# Altium PCB ESP32 with USBC.PcbDoc (part 2 of 3)
Units mil, origin at the board's own origin, x right, y up, seen from the top; angles counter-clockwise.
Board outline 2700 x 1000 mil, 4 copper layers (L1, L2, L3, L4), stack 61.583 mil thick; 64 components, 73 nets, 299 pads, 161 vias.
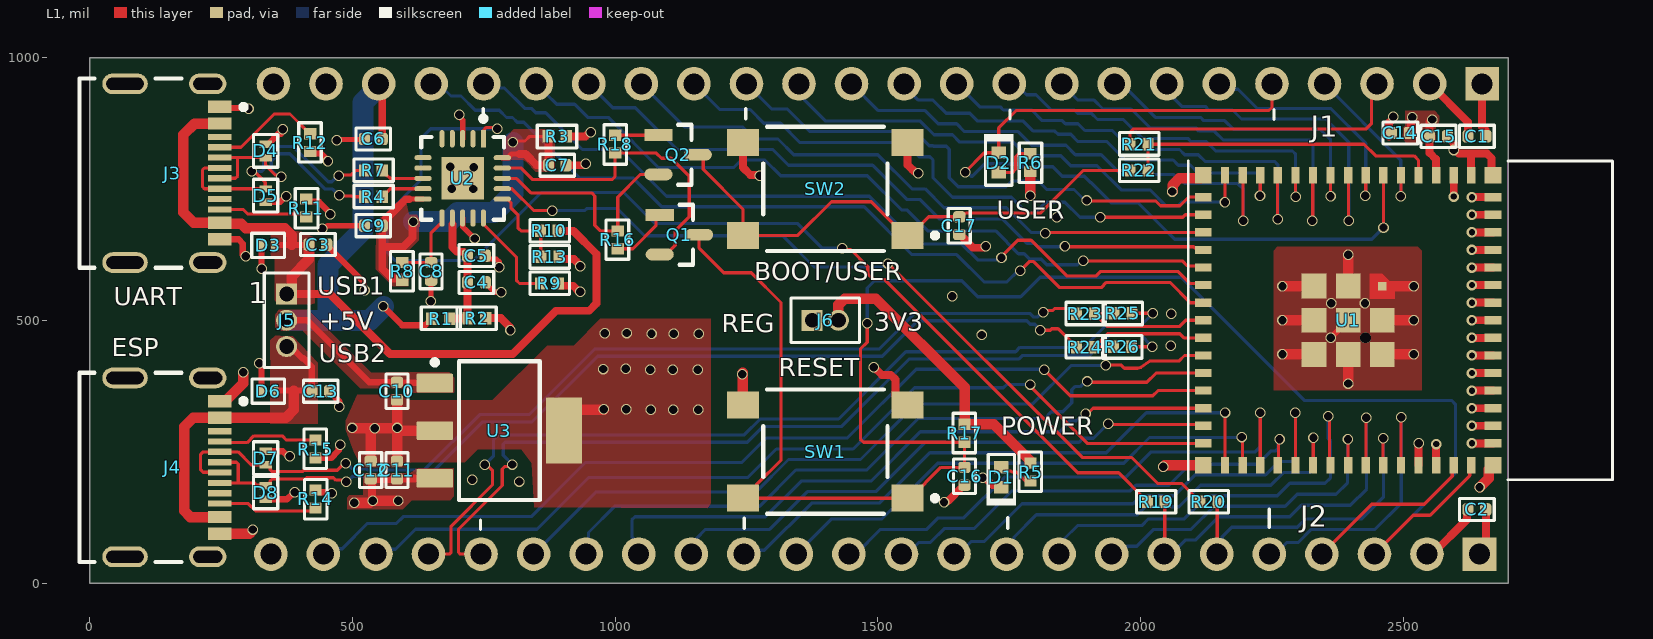
[diagram p0: L1 view]

## Part data (continued)
U1: "SMD module, ESP32-S3FN8, 8 MB SPI flash, PCB antenna", LCSC Part Number=C2913206, Manufacturer="Espressif Systems", Supplier Part Number=1965-ESP32-S3-MINI-1-N8CT-ND, Category=LDO, ComponentLink1Description=https://datasheet.octopart.com/ESP32-S3-MINI-1-N8-Espressif-Systems-datasheet-165560562.pdf?src-supplier=TME, ComponentLink1URL=https://datasheet.octopart.com/ESP32-S3-MINI-1-N8-Espressif-Systems-datasheet-165560562.pdf?src-supplier=TME, Manufacturer Part Number=ESP32-S3-MINI-1-N8, Pricing="1=3.1, 650=3.10002 (USD)", RoHS=No, Stock=14909, Supplier=Digikey
U2: "IC USB SERIAL FULL UART 20QFN", Case/Package=HVQCCN, LCSC Part Number=C132159, Manufacturer=FTDI, Max Operating Temperature=85°C, Max Supply Current=8.4mA, Max Supply Voltage=5.5V, Min Operating Temperature=-40°C, Min Supply Voltage=2.97V, Nominal Supply Voltage=5V, Package Shape=Square, Package Style="CHIP CARRIER, HEAT SINK/SLUG, VERY THIN PROFILEMeter", Power Supplies=3.3/5V, Supplier Part Number=768-1128-1-ND, Temperature Grade=INDUSTRIAL, Category="Interface ICs", ComponentLink1Description=https://datasheet.ciiva.com:443/pdfs/VipMasterIC/IC/FTDI/FTDIS00099/FTDIS00099-1.pdf?src-supplier=IHS+Markit, ComponentLink1URL=https://datasheet.ciiva.com:443/pdfs/VipMasterIC/IC/FTDI/FTDIS00099/FTDIS00099-1.pdf?src-supplier=IHS+Markit, ComponentLink2Description=https://datasheet.ciiva.com/1787/ds-ft231x-1787312.pdf?src-supplier=Digikey, ComponentLink2URL=https://datasheet.ciiva.com/1787/ds-ft231x-1787312.pdf?src-supplier=Digikey, ComponentLink3Description=https://datasheet.ciiva.com/30475/0900766b811020d3-30475405.pdf?src-supplier=Rs, ComponentLink3URL=https://datasheet.ciiva.com/30475/0900766b811020d3-30475405.pdf?src-supplier=Rs, ComponentLink4Description=https://datasheet.ciiva.com/4787/ds-ft231x-13571-4787570.pdf?src-supplier=Mouser, ComponentLink4URL=https://datasheet.ciiva.com/4787/ds-ft231x-13571-4787570.pdf?src-supplier=Mouser, ComponentLink5Description=https://datasheet.ciiva.com/1787/ft-x-series-1787313.pdf?src-supplier=Digikey, ComponentLink5URL=https://datasheet.ciiva.com/1787/ft-x-series-1787313.pdf?src-supplier=Digikey, ComponentLink6Description=https://datasheet.ciiva.com/1787/ft-x-series-1787314.pdf?src-supplier=Digikey, ComponentLink6URL=https://datasheet.ciiva.com/1787/ft-x-series-1787314.pdf?src-supplier=Digikey, Height - Seated (Max)=0.8mm, JESD-30 Code=S-XQCC-N20, Length=4mm, Manufacturer Part Number=FT231XQ-R, Pins=20, Pricing="1=2.34, 25=2.27, 100=2.2, 250=2, 500=1.82002, 1000=1.7625, 5000=1.7625 (USD)", Qualification Status="Not Qualified", Reach SVHC Compliant=Yes, RoHS=Yes, RoHS Compliant=Yes, Stock=59138, Supplier=Digikey, Surface Mount=Yes, Technology=CMOS, Terminal Form="No Lead", Terminal Pitch=0.5mm, Terminal Position=QUAD, Width=4mm
U3: "IC REG LINEAR 3.3V 1.5A SOT223-4", Case/Package=SOP, Dropout Voltage1-Max=550mV, Dropout Voltage1-Nom=340mV, Input Voltage Absolute-Max=20V, LCSC Part Number=C181262, Manufacturer="Texas Instruments", Min Input Voltage=3.8V, Operating Temperature, TJ-Max=125°C, Operating Temperature, TJ-Min=-40°C, Output Current1-Max=1.5A, Output Voltage1-Max=3.4V, Output Voltage1-Min=3.2V, Output Voltage1-Nom=3.3V, Package Body Material=Plastic, Package Shape=Rectangular, Package Style="SMALL OUTLINEMeter", Peak Reflow Temperature (Cel)=260°C, Supplier Part Number=296-24897-1-ND, Voltage Tolerance-Max=3%, Adjustability=FIXED, Category="Voltage Regulators - Linear", Channels=1, ComponentLink1Description=https://www.ti.com:443/lit/ds/symlink/tl1963a.pdf?src-supplier=IHS+Markit, ComponentLink1URL=https://www.ti.com:443/lit/ds/symlink/tl1963a.pdf?src-supplier=IHS+Markit, ComponentLink2Description=https://datasheet.ciiva.com/2046/-2046068.pdf?src-supplier=Digikey, ComponentLink2URL=https://datasheet.ciiva.com/2046/-2046068.pdf?src-supplier=Digikey, Height - Seated (Max)=1.8mm, JESD-30 Code=R-PDSO-G4, JESD-609 Code=e3, Length=6.5mm, Line Regulation-Max=0.01%, Load Regulation-Max=0.07%, Manufacturer Part Number=TL1963A-33DCYR, Max Supply Voltage=20V, Moisture Sensitivity Level=2, Number of Outputs=1, Packaging="Tape and Reel", Pins=4, Pricing="1=3.12, 10=2.255, 25=2.038, 100=1.7992, 250=1.68532, 500=1.61668, 1000=1.56017 (USD)", Qualification Status="Not Qualified", Reach SVHC Compliant=Yes, Regulator Type="FIXED POSITIVE SINGLE OUTPUT LDO REGULATOR", RoHS=Yes, RoHS Compliant=Yes, Stock=4155, Supplier=Digikey, Surface Mount=Yes, Technology=BIPOLAR, Terminal Finish=Tin, Terminal Form="Gull Wing", Terminal Pitch=2.3mm, Terminal Position=DUAL, Width=3.5mm

## Via types
v1: diameter 20, hole 16, L1 to L4, tented both sides, 142 vias
v2: diameter 20, hole 12, L1 to L4, tented both sides, 17 vias
v3: diameter 20, hole 20, L1 to L4, tented both sides, 1 vias
v4: diameter 20, hole 16, L1 to L4, 1 vias

## Nets (pads, with @x,y where several pads share a name; then routed paths per layer and width w, separated by ;. In a path a pad name is that pad's centre, name@x,y a point inside that pad or via, vN(x,y) a via of type N, cw(c..) or ccw(c..) an arc to the next point about the centre after c; other vN are vias at no path point)
+3V3: C1.2 C2.2 C14.2 C15.2 J1.2 J2.1 J6.2 R2.1 R3.1 R5.2 R6.2 R17.2 U1.3 | length 4535.5
  L1 w15: R2.1@754.06,503.03 R2.1@754.06,504.22 782.67,504.22 800.06,486.83 800.06,482.06 v1(801.01,481.1) ; R3.1@907.01,850 943.5,850 951.53,858.03 v1(953.97,858.03) ; C14.2@2511.47,856.42 2514.6,859.55 2514.6,881.16 2517,883.56 v1(2517,886) ; J1.2@2550,950 2623.07,876.93 C1.2@2623.07,850 ; v1(2555,882) 2550,877 C15.2@2550,850 2550,818.55 2561.91,806.64 2561.91,789.06 2561.99,788.98 2561.99,775.96 U1.3@2562.36,775.59 ; J2.1@2645,55 2656.93,66.93 C2.2@2656.93,140
  L1 w20: J6.2@1425,500 1425,529.07 1436.72,540.79 1496.4,540.79 1665,372.2 R17.2@1665,302.01 1720.45,302.01 1754.59,267.86 1788.74,233.72 1788.74,228.77 1789.37,228.14 R5.2@1790.55,228.14 ; v1(1790,737) R6.2@1790,782.99
  L1 w30: J6.2@1425,500 J6.2@1426.91,501.91
  L2 w15: v1(2517,886) 2548.56,886 2552.56,882 v1(2555,882)
  L2 w20: 2541.43,844.5 2541.43,722.13 2548.66,714.9 2548.66,643.48 2581.74,610.4 2581.74,312.45 2597.26,296.93 2597.26,159.92 2598.79,158.39 2598.79,101.21 J2.1@2645,55
  L2 w40: v1(801.01,481.1) 801.01,494.02 835.78,528.78 835.78,789.97 903.84,858.03 v1(953.97,858.03) 1098.54,858.03 1235.69,720.88 1331.52,720.88 ; J6.2@1425,500 1425,564.94 1401.57,588.37 1354.95,588.37 1331.52,611.81 1331.52,720.88 ; J1.2@2550,950 2554.59,945.41 2554.59,882.41 v1(2555,882) 2555,858.07 2541.43,844.5 2531.57,834.64 1887.64,834.64 v1(1790,737) 1773.88,720.88 1331.52,720.88
+3V3_FTDI: C7.2 C9.2 R3.2 R8.1 U2.10 U2.20 | length 857.7
  L1 w6: v1(805.57,838.48) 808.25,841.16 828.73,841.16 837.57,850 R3.2@872.99,850
  L1 w10.01: 608.28,730.27 608.64,730.63 U2.10@634.59,730.63 ; U2.20@785.41,809.37 796.71,809.37 796.94,809.6 796.94,810.18 803.03,816.28 818.46,816.28
  L1 w15: C9.2@556.93,678.82 556.93,639.39 ; C9.2@556.93,680 560.06,683.13 560.06,688.72 579.15,707.81 601.61,730.27 608.28,730.27 ; R8.1@595,575.98 591.87,579.11 575.76,579.11 556.93,597.94 556.93,639.39 ; v1(616.27,687.62) 614.55,685.9 614.55,662.31 614.55,657.17 596.77,639.39 556.93,639.39 ; 818.46,816.28 829.58,816.28 850.86,795 C7.2@873.07,795 ; C7.2@872.99,799.31 R3.2@872.99,850
  L4 w40: v1(616.27,687.62) 683.54,687.62 700.55,704.64 769.47,704.64 805.57,740.74 v1(805.57,838.48)
+3V3_REG: C11.2 C12.2 J6.1 U3.3 | length 1305
  L1 w15: v1@533.28,152.99 536.62,156.33 v1(539.06,156.33) ; v1@537.34,158.05 537.34,195.73 C12.2@535,198.07 C11.2@585,198.07 585.69,198.76 656.53,198.76 657.22,199.45 U3.3@656.97,199.45
  L1 w20: v1(503.51,152.99) v1@533.28,152.99 ; v1(539.06,156.33) v1@587.18,156.33
  L2 w40: v1(587.41,156.56) 596.06,156.56 682.57,243.06 ; 1337.52,455.73 1337.52,462.52 J6.1@1375,500
  L2 w60: 682.57,243.06 747.98,308.48 827.43,308.48 870.38,265.52 919.01,265.52 920.89,267.41 1296.88,267.41 1337.52,308.05 1337.52,455.73
+5V: C6.2 C10.1 J1.22 J5.2 R1.1 U3.1 | length 1235.5
  L1 w12: J5.2@375,500 414,500 532.07,381.93 C10.1@585,381.93 585.69,381.24 656.28,381.24 U3.1@656.97,380.55 ; v1(559.13,526.31) 594.74,490.71 638.64,490.71 645.25,497.32 646.43,497.32 651.06,501.95 R1.1@651.06,503.13
  L1 w15: J1.22@550,950 556.93,943.07 C6.2@556.93,846.18
  L4 w40: J5.2@375,500 453.87,500 ; J1.22@550,950 550,943.51 520.54,914.04 520.54,671.55 453.87,604.88 453.87,500 ; v1(559.13,526.31) 532.82,500 453.87,500
+5V_VBUS1: C3.2 D3.2 J3.A4B9 J3.B4A9 J5.1 R10.2 | length 1506.5
  L1 w12: D3.2@352.45,642.61 353.17,643.32 384.97,643.32 C3.2@416.77,643.32
  L1 w15: J5.1@375,550 384.53,550 457.58,550 571.81,435.77 805.26,435.77 887.66,518.17 950.69,518.17 964.46,531.94 964.46,626.43 920.89,670 R10.2@892.01,670
  L1 w20: J3.A4B9@247.64,874.41 199.96,874.41 178.52,852.97 178.52,705.42 198.5,685.43 J3.B4A9@247.64,685.43 249.45,683.62 288.7,683.62 297.13,675.19 371.82,675.19 384.97,662.04 384.97,643.32 ; J5.1@375,550 384.53,559.53 384.53,582.9 417.48,615.85 C3.2@417.48,644.03
+5V_VBUS2: C13.2 D6.2 J4.A4B9 J4.B4A9 J5.3 | length 673.3
  L1 w12: D6.2@352.8,365 354.64,365 355.88,366.24 388.85,366.24 421.83,366.24 C13.2@423.07,365 423.07,411.66 407.06,427.67 404.9,427.67 382.58,450 J5.3@375,450
  L1 w20: J4.B4A9@247.64,125.59 191.83,125.59 180.12,137.31 180.12,297.72 196.97,314.57 J4.A4B9@247.64,314.57 373.82,314.57 388.85,329.6 388.85,366.24
+VCC_FTDI: C4.1 C5.2 R1.2 R2.2 U2.12 | length 208.3
  L1 w15: R1.2@685.08,503.13 R2.2@710.08,503.13 ; U2.12@690.32,682.28 690.32,639.11 699.1,630.33 C5.2@711.82,630.33 ; R2.2@716.2,509.25 719.14,512.19 C4.1@719.14,572 C5.2@719.14,623
BTN_GPIO0: C17.2 Q2.3 R22.1 SW2.1 SW2.2 | length 1032.7
  L1 w6: Q2.3@1157.42,815 1162.09,815 1167.88,809.21 1167.88,787.12 1243.5,711.5 SW2.2@1243.5,661.42 1347.71,661.42 1411.78,725.48 1487.51,725.48 1551.57,661.42 SW2.1@1556.5,661.42 1561.42,661.42 1596.93,696.93 C17.2@1655,696.93 1660.24,702.17 1665.45,702.17 1667.67,704.38 1810.07,704.38 1890.69,785 R22.1@1980,785
CHIP_PU: C16.2 J2.3 Q1.3 R17.1 SW1.1 SW1.2 U1.45 | length 3478.1
  L1 w6: Q1.3@1159.85,662.6 1159.85,637.33 1206.7,590.48 1259.09,590.48 1315.76,533.81 1315.76,233.67 1269.02,186.93 1269.02,182.01 SW1.2@1248.43,161.42 ; SW1.2@1243.5,161.42 SW1.2@1248.43,161.42 ; v1(1479.92,494.32) 1479.92,458.26 1466.9,445.24 1466.9,273.85 1472.76,267.99 R17.1@1665,267.99 C16.2@1665,220 1620,220 1561.42,161.42 SW1.1@1556.5,161.42 SW1.2@1248.43,161.42 ; J2.3@2445,55 2519,129 2551,129 2626.42,204.42 2626.42,221.54 U1.45@2629.29,224.41
  L4 w6: v1(1479.92,494.32) 1479.92,561.41 1493.58,575.07 1659.98,575.07 1690.19,544.86 1771.79,544.86 1808.84,581.91 2077.45,581.91 2312.29,347.08 2592.5,347.08 2599.12,340.46 2599.12,209.12 J2.3@2445,55
CON1_USB_N: D4.2 J3.A7 J3.B7 R4.1 | length 468.8
  L1 w6.03: J3.A7@247.64,770.08 277.63,770.08 281.77,774.22 281.77,809.43 ; J3.B7@247.66,809.43 281.77,809.43 ; D4.2@335,809.41 335,794.72 353.27,776.45 360.98,776.45 v4(364.42,773.01) ; D4.2@335,809.41 281.77,809.43 ; v1@475.03,737.44 475.8,736.66 499.09,736.66 500.75,735 R4.1@522.99,735
  L4 w6.03: 349.16,783.37 345.63,786.91 345.63,802.16 360.41,816.94 381.14,816.94 448.46,749.62 462.51,749.62 474.69,737.44 v1@475.03,737.44 ; 349.2,783.37 359.56,773.01 v4(364.42,773.01)
  other v1: 475.51,737.81
CON1_USB_P: D5.1 J3.A6 J3.B6 R7.1 | length 517.1
  L1 w6.03: J3.A6@247.64,789.76 218.55,789.76 215.02,786.23 215.02,753.93 218.55,750.39 J3.B6@247.64,750.39 247.83,750.2 334,750.2 334.4,750.6 334.4,762.4 316.87,779.93 311.96,779.93 v1(308.52,783.37) ; v1@473.31,775.83 473.65,776.17 497.37,776.17 506.2,785 R7.1@522.99,785
  L4 w6.03: v1(308.52,783.37) 328.07,783.37 331.6,786.91 331.6,807.97 354.6,830.97 386.96,830.97 454.27,763.65 460.79,763.65 472.98,775.83 v1@473.31,775.83
  other v1: 473.97,774.78
CON2_USB_N: D7.2 J4.A7 J4.B7 R23.1 | length 1905.6
  L1 w6.03: J4.A7@247.64,210.24 247.02,210.85 215.95,210.85 211.38,215.43 211.38,244.73 216.25,249.61 J4.B7@247.64,249.61 282.66,249.61 307.26,225 D7.2@335,225 339.92,225 343.8,221.13 343.8,215.55 347.33,212.01 405.18,212.01 407.64,214.47 471.23,214.47 482.66,225.91 487.66,225.91 v1(487.66,227.81) ; v1(1815.13,515.63) 1817.8,518.3 1832.25,518.3 1836.12,522.17 1868.32,522.17 1869.34,521.14 1870.52,521.14 1878.14,513.53 R23.1@1878.14,512.35
  L4 w6.03: v1(487.66,227.81) 489.51,227.81 500.17,217.15 526.77,217.15 528.73,215.2 636.91,215.2 742.27,320.55 836.15,320.55 961.01,445.42 1502.78,445.42 1570.51,513.15 1789.19,513.15 1795.86,506.48 1804.61,506.48 1813.76,515.63 v1(1815.13,515.63)
CON2_USB_P: D8.1 J4.A6 J4.B6 R24.1 | length 1872
  L1 w6.03: J4.B6@247.64,190.55 280.58,190.55 ; J4.A6@247.64,229.92 279.34,229.92 282.87,226.39 282.87,192.85 280.58,190.55 ; v1(488.37,192.46) 484.93,195.9 468.86,195.9 464.31,200.44 413.45,200.44 410.99,197.99 347.33,197.99 343.8,194.45 343.8,188.87 339.92,185 D8.1@335,185 333.61,186.39 317.68,186.39 313.51,190.55 280.58,190.55 ; v1(1809.05,481.07) 1828.27,481.07 1831.11,483.91 1843.06,483.91 1869.16,457.81 1870.34,457.81 1877.96,450.2 R24.1@1877.96,449.02
  L4 w6.03: v1(488.37,192.46) 490.23,192.46 500.89,203.12 520.96,203.12 522.91,201.17 642.73,201.17 748.08,306.52 841.96,306.52 966.82,431.39 1508.59,431.39 1576.32,499.12 1783.38,499.12 1790.05,492.45 1798.54,492.45 1809.05,481.93 v1(1809.05,481.07)
CON_ESP_USB_N: J2.21 R25.1 | length 1700.9
  L1 w6.03: J2.21@645,55 684.45,55 687.99,58.53 687.99,108.01 766.6,186.62 766.6,214.84 756.25,225.2 v1(752.19,225.2) ; R25.1@1983.46,513.37 v1(2023.54,513.39)
  L4 w6.03: v1(752.19,225.2) 768.37,241.37 768.37,272.27 777.92,281.82 1245.81,281.82 1276.04,312.05 1425.46,312.05 1553.51,440.1 1762.11,440.1 1770.37,448.35 1892.37,448.35 1933.07,489.05 1999.2,489.05 v1(2023.54,513.39)
CON_ESP_USB_P: J2.20 R26.1 | length 1678.8
  L1 w6.03: J2.20@745,55 705.55,55 702.01,58.53 702.01,102.2 785.49,185.67 785.49,216.91 790.6,222.02 801.31,222.02 v1(804.75,225.46) ; R26.1@1982.48,449.75 v1@2022.55,449.75
  L4 w6.03: v1(804.75,225.46) 787.11,243.1 787.11,264.26 790.64,267.79 1251.62,267.79 1281.85,298.02 1431.27,298.02 1559.32,426.07 1767.92,426.07 1774.59,432.74 1902.05,432.74 1943.37,474.06 1998.27,474.06 v1(2022.56,449.77)
CON_GPIO0: J1.3 R21.1 | length 569
  L1 w6: R21.1@1980,835 1980,857.78 1985.86,863.64 2428.55,863.64 2439.67,874.76 2439.67,939.67 J1.3@2450,950
DTR_FTDI: Q2.2 R16.2 U2.18 | length 453.4
  L1 w6: U2.18@785.41,770 785.64,769.77 812.38,769.77 813.16,769 839.81,742.34 955.47,742.34 961.33,736.49 961.33,680.78 972.11,670 R16.2@1005,670 1005,734.2 1048.4,777.6 Q2.2@1082.58,777.6
ESP_USB_N: R23.2 R25.2 U1.23 | length 270.9
  L1 w6.03: R25.2@1948.42,512.35 R23.2@1912.15,512.35 1912.15,511.17 1919.77,503.55 1920.95,503.55 1936.13,488.38 2074.47,488.38 2086.1,500 U1.23@2119.45,500 ; R25.2@1949.44,513.37 1949.44,512.19 R25.2@1957.06,504.58
ESP_USB_P: R24.2 R26.2 U1.24 | length 258.7
  L1 w6.03: R26.2@1948.46,449.75 1947.73,449.02 R24.2@1911.97,449.02 1911.97,450.2 1919.59,457.81 1920.77,457.81 1937.3,474.35 2074.64,474.35 2082.45,466.54 U1.24@2119.45,466.54
FTDI_USB_N: R4.2 U2.9 | length 84.6
  L1 w6.03: R4.2@557.01,735 557.01,736.18 564.62,743.8 565.8,743.8 572.32,750.32 U2.9@634.59,750.32